# EAGLE board zeta2rework_lw_v34_rework (EAGLE 9.3.1)
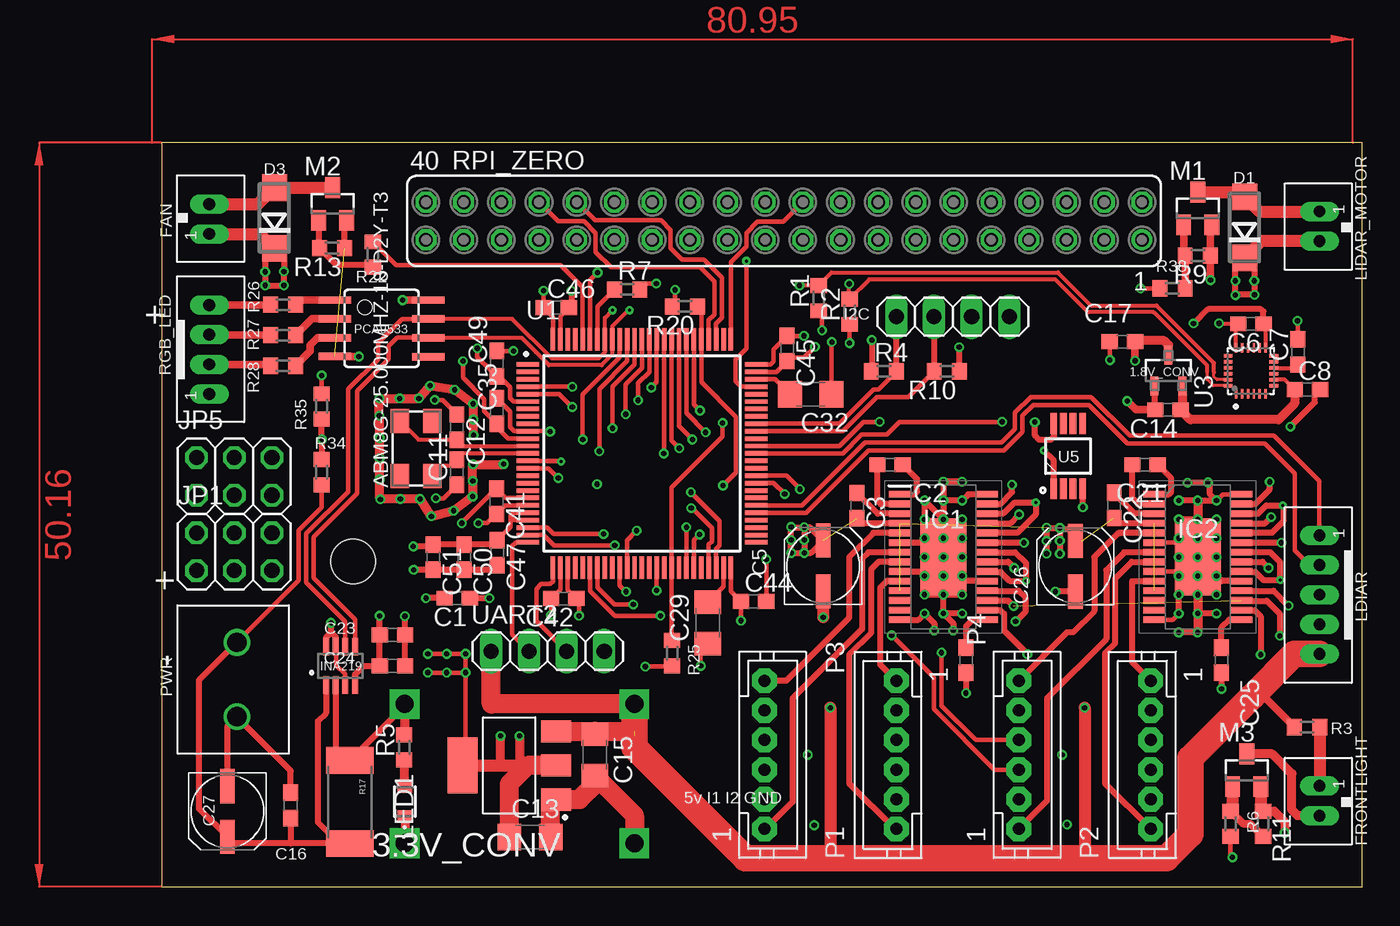
[diagram p0: board, top side]
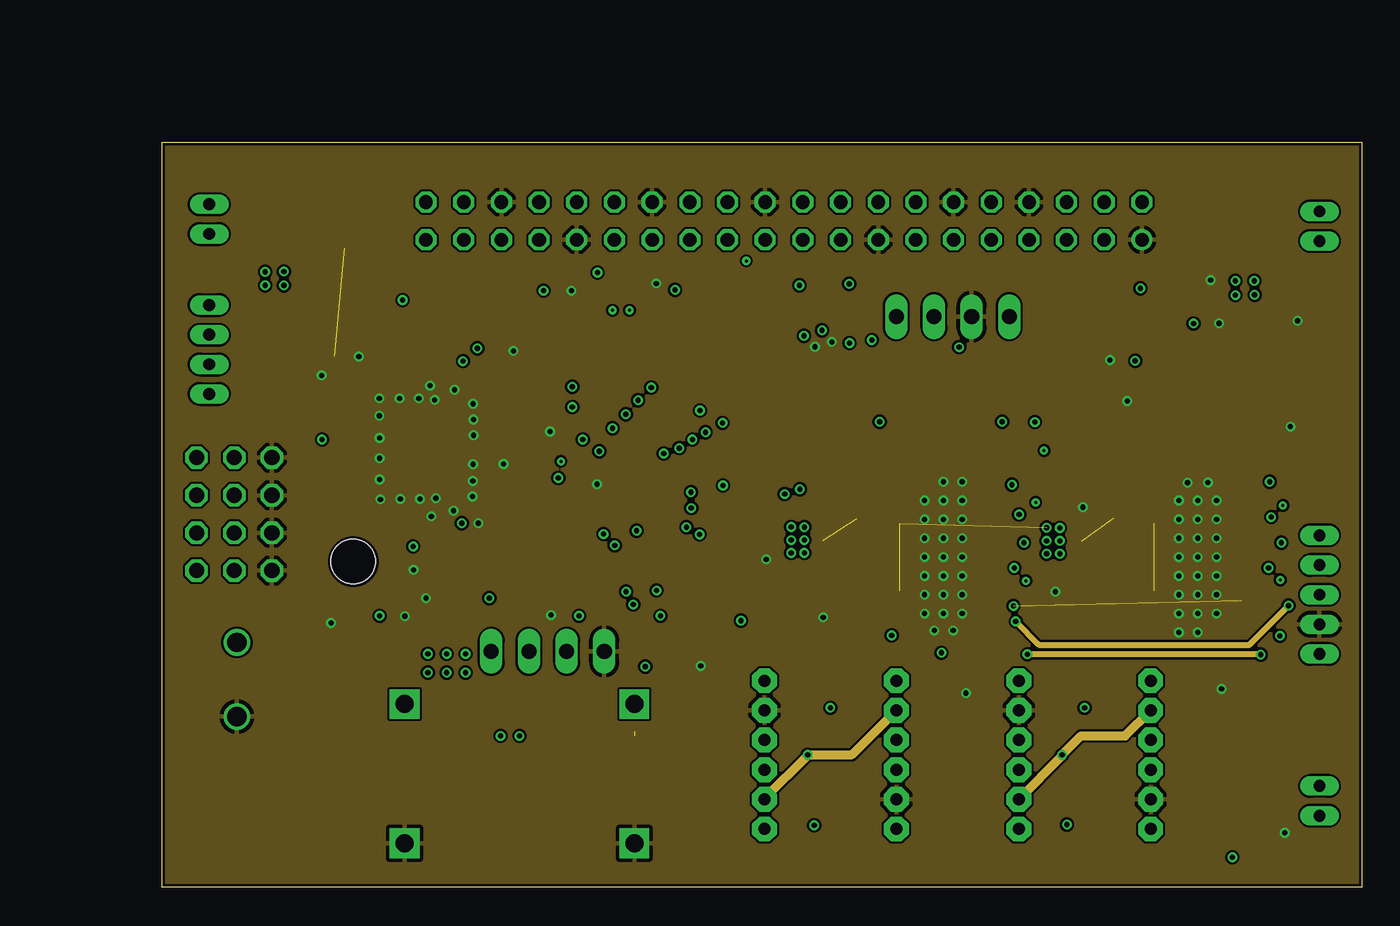
[diagram p1: board, inner layer Route2]
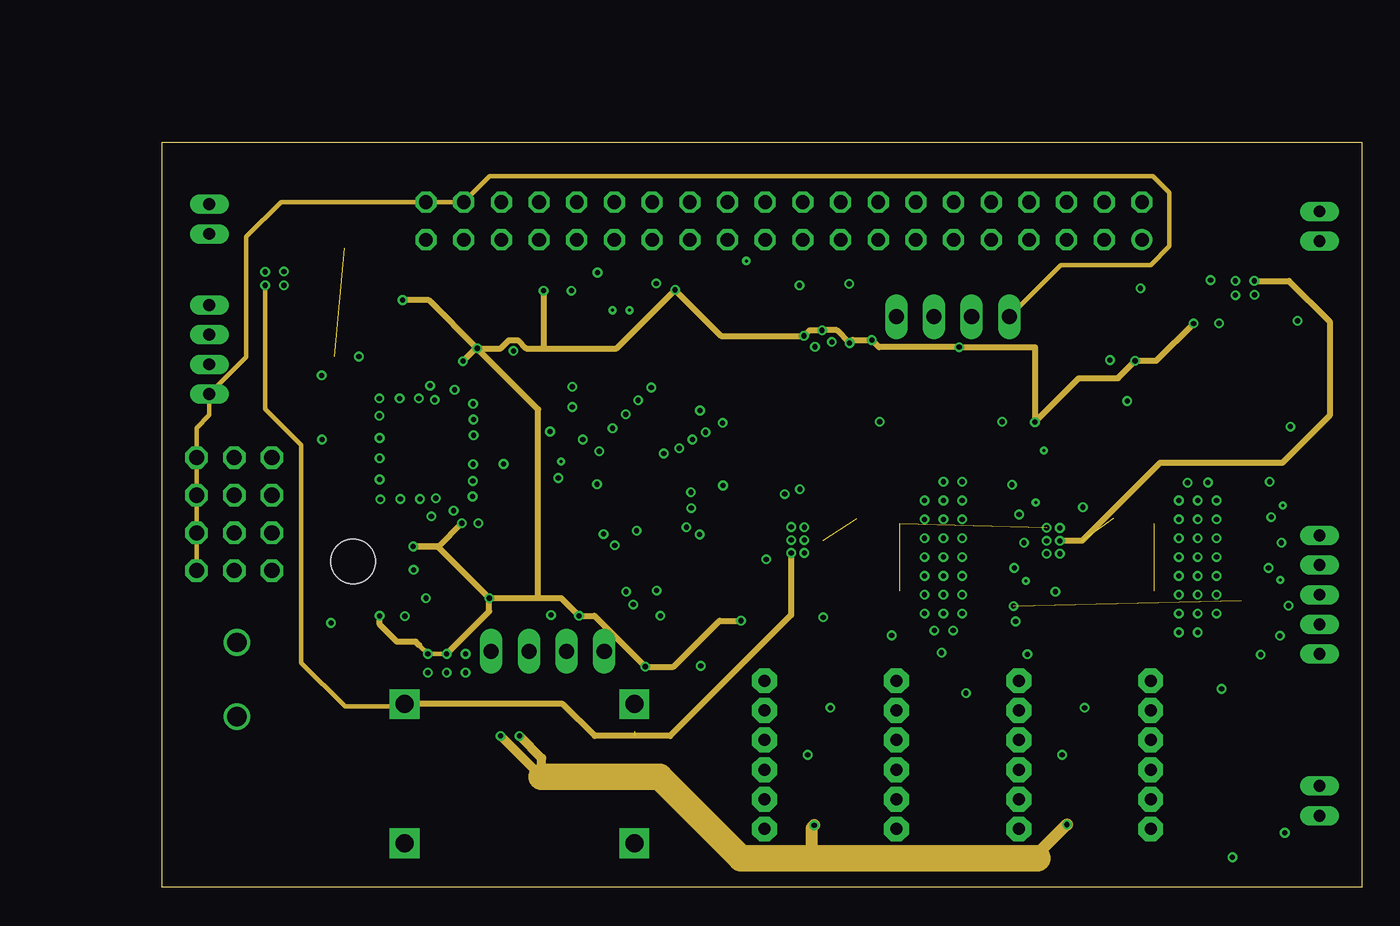
[diagram p2: board, inner layer Route15]
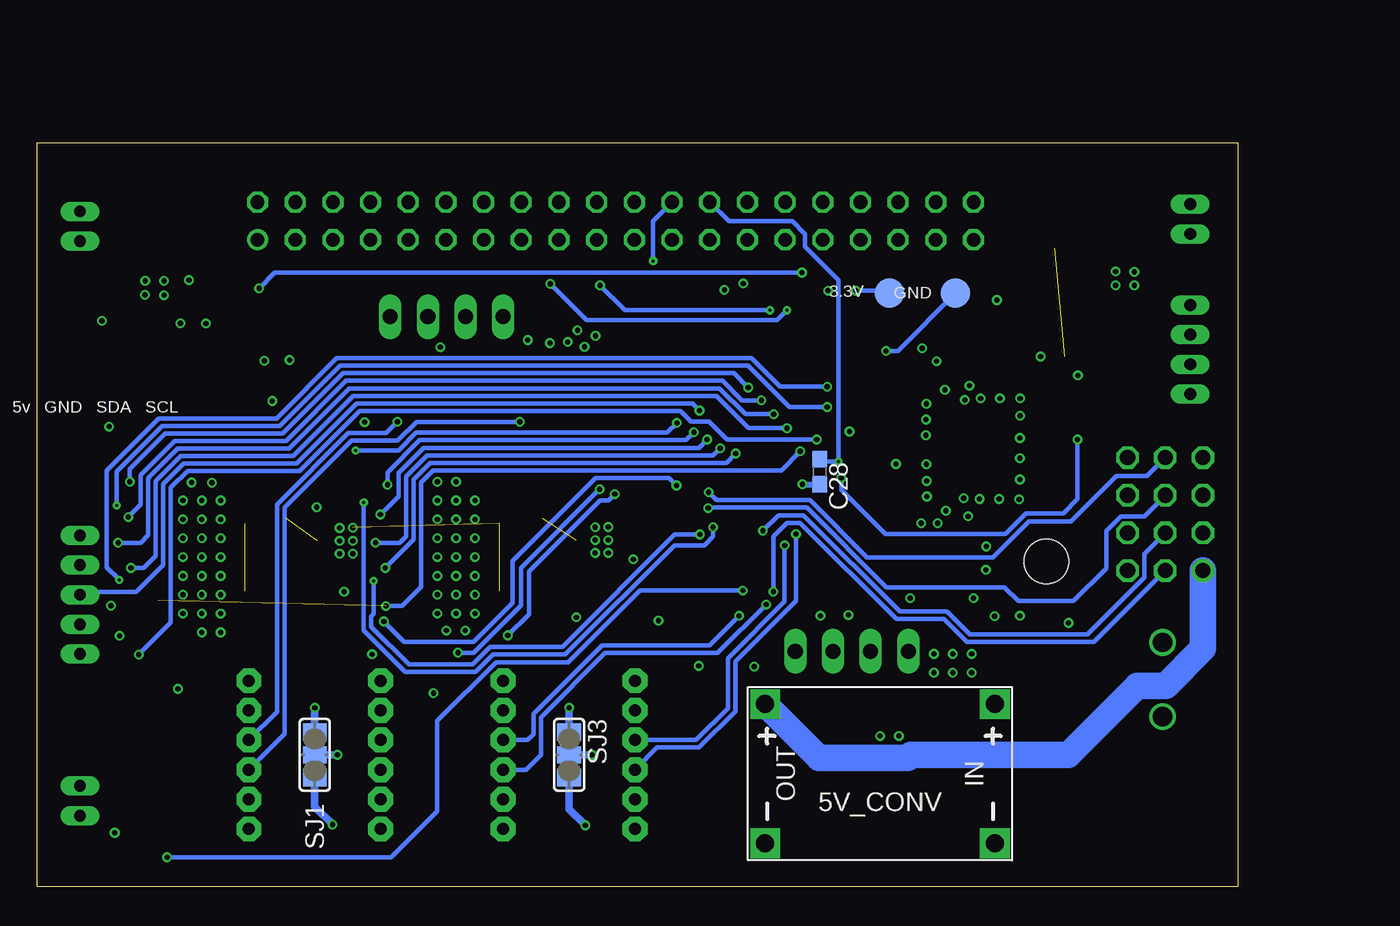
[diagram p3: board, bottom side, seen from below]

Size 80.95 x 50.16 mm. Coordinates in mm from the lower left corner, seen from the top.
Outline: 0,0 80.95,0 80.95,50.16 0,50.16 0,0
Copper layers (1*2*15*16): Top 0.035mm / dielectric 0.2mm / Route2 0.018mm / dielectric 1.5mm / Route15 0.018mm / dielectric 0.2mm / Bottom 0.035mm
Design rules "aisler_4_layer": minimum track width 0.1mm, minimum drill 0.2mm, track to track 0.1mm, track to pad 0.1mm, pad to pad 0.1mm, via to via 0.1mm, smd to smd 0.1mm, copper to edge 0.2mm, drill to drill 0.21mm, minimum pad ring 0.25mm, minimum via ring 0.15mm, stop-mask expansion 0mil, vias tented up to drill 0mil, thermal gap 10mil
Net classes: 0 default: clearance 0.152 mm
Holes 3 mm at 12.93,21.92

## Footprints (pad centres in the part's own frame; a part is rotated, then mirrored left to right if it is on the bottom)
SOT95P237X112-3N = smd 0.559 x 1.27: 1 -0.94,-1.041; 2 0.94,-1.041; 3 0,1.041
TP20R = smd 2 x 2: TP 0,0
SOT230P700X175-4N = smd 2 x 1.5: 1 -3.15,2.3; 2 -3.15,0; 3 -3.15,-2.3 | smd 2 x 3.8: 4 3.15,0
DC-DC-STEP-DOWN-MP2307 = drill 1.2 pad 2 square: IN+ -7.747,-4.699; IN- -7.747,4.699; OUT+ 7.747,-4.699; OUT- 7.747,4.699
5.0X3.2_KX-9A = smd 1.6 x 1.25: 1 -1.85,-1.1; 2 1.85,-1.1; 3 1.85,1.1; 4 -1.85,1.1
C0603 = smd 1.1 x 1: 1 -0.85,0; 2 0.85,0
UD-5X5,8_NICHICON = smd 2.3 x 1: + 1.725,0; - -1.7,0
C1206 = smd 1.6 x 1.8: 1 -1.4,0; 2 1.4,0
DO214AC = smd 1.8 x 1.7: A 2.05,0; C -2.05,0
JST_B2B-PH_HEADER = drill 0.8 long: P1 1.075,0.048; P2 -0.925,0.048
1X04 = drill 1.016 long: 1 -3.81,0; 2 -1.27,0; 3 1.27,0; 4 3.81,0
SOP65P640X120-29N = smd 1.475 x 0.45: 1 -2.938,4.225; 2 -2.938,3.575; 3 -2.938,2.925; 4 -2.938,2.275; 5 -2.938,1.625; 6 -2.938,0.975; 7 -2.938,0.325; 8 -2.938,-0.325; 9 -2.938,-0.975; 10 -2.938,-1.625; 11 -2.938,-2.275; 12 -2.938,-2.925; 13 -2.938,-3.575; 14 -2.938,-4.225; 15 2.938,-4.225; 16 2.938,-3.575; 17 2.938,-2.925; 18 2.938,-2.275; 19 2.938,-1.625; 20 2.938,-0.975; 21 2.938,-0.325; 22 2.938,0.325; 23 2.938,0.975; 24 2.938,1.625; 25 2.938,2.275; 26 2.938,2.925; 27 2.938,3.575; 28 2.938,4.225 | smd 3.1 x 5.18: 29 0,0
SOT23-8 = smd 0.4 x 1.2: 1 -0.975,-1.3; 2 -0.325,-1.3; 3 0.325,-1.3; 4 0.975,-1.3; 5 0.975,1.3; 6 0.325,1.3; 7 -0.325,1.3; 8 -0.975,1.3
2X03 = drill 1.016 octagon: 1 -2.54,-1.27; 2 -2.54,1.27; 3 0,-1.27; 4 0,1.27; 5 2.54,-1.27; 6 2.54,1.27
JST_B5B-PH_HEADER = drill 0.8 long: P1 4,0.048; P2 2,0.048; P3 0,0.048; P4 -2,0.048; P5 -4,0.048
LTM673-N1R2-25 = smd 0.8 x 1: 1 -1,0; 2 1,0
SOT23 = smd 1 x 1.4: 1 -0.95,-1.1; 2 0.95,-1.1; 3 0,1.1
JST-PH6 = drill 0.813 pad 1.676 octagon: 1 5,0; 2 3,0; 3 1,0; 4 -1,0; 5 -3,0; 6 -5,0
SOIC8 = smd 0.5 x 2.2: 1 -1.905,-3.154; 2 -0.645,-3.154; 3 0.625,-3.154; 4 1.895,-3.154; 5 1.905,3.154; 6 0.635,3.154; 7 -0.635,3.154; 8 -1.905,3.154
691137710002 = drill 1.3: 1 -2.5,0; 2 2.5,0
R0603 = smd 1 x 1.1: 1 -0.85,0; 2 0.85,0
2512 = smd 1.8 x 3.2: 1 -2.8,0; 2 2.8,0
JST_B4B-PH_HEADER = drill 0.8 long: P1 2.98,0.048; P2 0.98,0.048; P3 -1.02,0.048; P4 -3.02,0.048
FE20-2 = drill 0.914: 1 -24.13,1.27 | drill 0.914 octagon: 2 -24.13,-1.27; 3 -21.59,1.27; 4 -21.59,-1.27; 5 -19.05,1.27; 6 -19.05,-1.27; 7 -16.51,1.27; 8 -16.51,-1.27; 9 -13.97,1.27; 10 -13.97,-1.27; 11 -11.43,1.27; 12 -11.43,-1.27; 13 -8.89,1.27; 14 -8.89,-1.27; 15 -6.35,1.27; 16 -6.35,-1.27; 17 -3.81,1.27; 18 -3.81,-1.27; 19 -1.27,1.27; 20 -1.27,-1.27; 21 1.27,1.27; 22 1.27,-1.27; 23 3.81,1.27; 24 3.81,-1.27; 25 6.35,1.27; 26 6.35,-1.27; 27 8.89,1.27; 28 8.89,-1.27; 29 11.43,1.27; 30 11.43,-1.27; 31 13.97,1.27; 32 13.97,-1.27; 33 16.51,1.27; 34 16.51,-1.27; 35 19.05,1.27; 36 19.05,-1.27; 37 21.59,1.27; 38 21.59,-1.27; 39 24.13,1.27; 40 24.13,-1.27
SJ_2 = smd 1.168 x 1.6: 1 -1.524,0; 2 0,0; 3 1.524,0
QFP50P1600X1600X160-100N = smd 1.5 x 0.3: 1 -7.7,6; 2 -7.7,5.5; 3 -7.7,5; 4 -7.7,4.5; 5 -7.7,4; 6 -7.7,3.5; 7 -7.7,3; 8 -7.7,2.5; 9 -7.7,2; 10 -7.7,1.5; 11 -7.7,1; 12 -7.7,0.5; 13 -7.7,0; 14 -7.7,-0.5; 15 -7.7,-1; 16 -7.7,-1.5; 17 -7.7,-2; 18 -7.7,-2.5; 19 -7.7,-3; 20 -7.7,-3.5; 21 -7.7,-4; 22 -7.7,-4.5; 23 -7.7,-5; 24 -7.7,-5.5; 25 -7.7,-6; 51 7.7,-6; 52 7.7,-5.5; 53 7.7,-5; 54 7.7,-4.5; 55 7.7,-4; 56 7.7,-3.5; 57 7.7,-3; 58 7.7,-2.5; 59 7.7,-2; 60 7.7,-1.5; 61 7.7,-1; 62 7.7,-0.5; 63 7.7,0; 64 7.7,0.5; 65 7.7,1; 66 7.7,1.5; 67 7.7,2; 68 7.7,2.5; 69 7.7,3; 70 7.7,3.5; 71 7.7,4; 72 7.7,4.5; 73 7.7,5; 74 7.7,5.5; 75 7.7,6 | smd 0.3 x 1.5: 26 -6,-7.7; 27 -5.5,-7.7; 28 -5,-7.7; 29 -4.5,-7.7; 30 -4,-7.7; 31 -3.5,-7.7; 32 -3,-7.7; 33 -2.5,-7.7; 34 -2,-7.7; 35 -1.5,-7.7; 36 -1,-7.7; 37 -0.5,-7.7; 38 0,-7.7; 39 0.5,-7.7; 40 1,-7.7; 41 1.5,-7.7; 42 2,-7.7; 43 2.5,-7.7; 44 3,-7.7; 45 3.5,-7.7; 46 4,-7.7; 47 4.5,-7.7; 48 5,-7.7; 49 5.5,-7.7; 50 6,-7.7; 76 6,7.7; 77 5.5,7.7; 78 5,7.7; 79 4.5,7.7; 80 4,7.7; 81 3.5,7.7; 82 3,7.7; 83 2.5,7.7; 84 2,7.7; 85 1.5,7.7; 86 1,7.7; 87 0.5,7.7; 88 0,7.7; 89 -0.5,7.7; 90 -1,7.7; 91 -1.5,7.7; 92 -2,7.7; 93 -2.5,7.7; 94 -3,7.7; 95 -3.5,7.7; 96 -4,7.7; 97 -4.5,7.7; 98 -5,7.7; 99 -5.5,7.7; 100 -6,7.7
QFN40P300X300X105-25N = smd 0.64 x 0.22: 1 -1.545,1; 2 -1.545,0.6; 3 -1.545,0.2; 4 -1.545,-0.2; 5 -1.545,-0.6; 6 -1.545,-1; 13 1.545,-1; 14 1.545,-0.6; 15 1.545,-0.2; 16 1.545,0.2; 17 1.545,0.6; 18 1.545,1 | smd 0.22 x 0.64: 7 -1,-1.545; 8 -0.6,-1.545; 9 -0.2,-1.545; 10 0.2,-1.545; 11 0.6,-1.545; 12 1,-1.545; 19 1,1.545; 20 0.6,1.545; 21 0.2,1.545; 22 -0.2,1.545; 23 -0.6,1.545; 24 -1,1.545
SOP65P490X95-8N = smd 1.4 x 0.45: 1 -2.2,0.975; 2 -2.2,0.325; 3 -2.2,-0.325; 4 -2.2,-0.975; 5 2.2,-0.975; 6 2.2,-0.325; 7 2.2,0.325; 8 2.2,0.975

## Placement (x,y rotation side)
1.8V_CONV  MCP1700T-1802E/TT  [SOT95P237X112-3N]  67.87,34.8 0 top
3.3V  TPSQTP20R  [TP20R]  23.5,40.01 0 bottom
3.3V_CONV  NCP1117LPST33T3G  [SOT230P700X175-4N]  23.44,8.18 180 top
5V_CONV  DC-DC-STEP-DOWN-MP2307  [DC-DC-STEP-DOWN-MP2307]  24.13,7.62 180 bottom
ABM8G-25.000MHZ-18-D2Y-T3  25mhz  [5.0X3.2_KX-9A]  17.17,29.54 90 top
C1  4.7µf  [C0603]  19.94,19.46 180 top
C2  0.01µf 100v  [C0603]  49.11,28.45 180 top
C3  0.1µF 16v  [C0603]  46.89,25.69 270 top
C4  0.47µF 6.3v  [C0603]  54.23,15.28 270 top
C5  47µF  [UD-5X5,8_NICHICON]  44.6,21.62 90 top
C6  0.1nF  [C0603]  73.43,37.95 180 top
C7  0.1nF  [C0603]  76.61,36.05 90 top
C8  0.1nF  [C0603]  77.24,33.51 0 top
C11  Xpf  [C0603]  19.91,27.94 90 top
C12  Xpf  [C0603]  19.91,30.99 270 top
C13  10µF  [C1206]  24.84,3.35 0 top
C14  1µF  [C0603]  67.84,32.16 180 top
C15  10µF  [C1206]  29.21,8.89 270 top
C16  0.1µF  [C0603]  8.71,5.49 90 top
C17  1µF  [C0603]  64.77,36.75 180 top
C21  0.01µf 100v  [C0603]  66.29,28.45 180 top
C22  0.1µF 16v  [C0603]  64.21,25.7 270 top
C23  100nf  [C0603]  15.57,16.97 0 top
C24  0.1µF  [C0603]  15.57,14.88 0 top
C25  0.47µF 6.3v  [C0603]  71.45,15.28 270 top
C26  47µF  [UD-5X5,8_NICHICON]  61.59,21.59 90 top
C27  100µF  [UD-5X5,8_NICHICON]  4.45,5.08 270 top
C28  100nF  [C0603]  28.19,27.98 270 bottom
C29  2.2µf Low ESR < 2ohm  [C1206]  36.83,17.78 90 top
C32  2.2µf Low ESR < 2ohm  [C1206]  43.76,33.2 180 top
C35  100nF  [C0603]  22.61,32.07 90 top
C41  100nF  [C0603]  22.58,25.98 270 top
C42  100nF  [C0603]  27.11,19.43 180 top
C44  100nF  [C0603]  39.92,19.23 0 top
C45  100nF  [C0603]  42.16,36.28 270 top
C46  100nF  [C0603]  26.61,39.04 0 top
C47  100nF  [C0603]  22.63,22.52 270 top
C49  100nF  [C0603]  22.61,35.27 90 top
C50  100nF  [C0603]  20.4,22.21 270 top
C51  1µf  [C0603]  18.31,22.21 270 top
D1  1N4004 SMD  [DO214AC]  73.03,44.45 90 top
D3  1N4004 SMD  [DO214AC]  7.62,45.09 90 top
FAN  JST-PH_2-PIN_HEADER  [JST_B2B-PH_HEADER]  3.17,45.09 270 top
FRONTLIGHT  JST-PH_2-PIN_HEADER  [JST_B2B-PH_HEADER]  78.11,5.71 90 top
GND  TPSQTP20R  [TP20R]  19.05,40.01 0 bottom
I2C  [1X04]  53.34,38.43 0 top
IC1  DRV8844PWPR  [SOP65P640X120-29N]  52.7,22.23 0 top
IC2  DRV8844PWPR  [SOP65P640X120-29N]  69.85,22.23 0 top
INA219  INA219  [SOT23-8]  12.06,14.88 0 top
JP1  [2X03]  4.9,22.58 0 top
JP5  [2X03]  4.9,27.66 0 top
LDIAR  JST-PH_5-PIN_HEADER  [JST_B5B-PH_HEADER]  78.11,19.69 90 top
LED1  LT M673  [LTM673-N1R2-25]  16.41,5.74 90 top
LIDAR_MOTOR  JST-PH_2-PIN_HEADER  [JST_B2B-PH_HEADER]  78.11,44.45 90 top
M1  IRLML2502  [SOT23]  69.85,45.72 0 top
M2  IRLML2502  [SOT23]  11.53,46.02 0 top
M3  IRLML2502  [SOT23]  73.15,7.85 0 top
P1  [JST-PH6]  49.53,8.89 90 top
P2  [JST-PH6]  66.67,8.89 90 top
P3  [JST-PH6]  40.64,8.89 270 top
P4  [JST-PH6]  57.78,8.89 270 top
PCA9533  PCA9533  [SOIC8]  14.83,37.64 270 top
PWR  691137710002  [691137710002]  5.08,13.97 270 top
R1  10k  [R0603]  44.3,39.67 90 top
R2  10k  [R0603]  46.38,38.76 90 top
R3  0R  [R0603]  77.22,10.77 0 top
R4  10k  [R0603]  48.69,34.75 0 top
R5  390R  [R0603]  16.36,9.4 90 top
R6  22R  [R0603]  72.06,4.24 90 top
R7  10k  [R0603]  31.39,40.26 0 top
R9  100k  [R0603]  69.85,42.55 180 top
R10  10k  [R0603]  52.93,34.75 180 top
R11  100k  [R0603]  74.24,4.24 270 top
R13  100k  [R0603]  11.51,43.05 180 top
R17  0.1/1% (PT2512FK-070R1L)  [2512]  12.7,5.71 270 top
R20  100k  [R0603]  35.28,39.12 180 top
R22  22R  [R0603]  14.25,42.62 270 top
R25  4k7  [R0603]  34.42,15.75 270 top
R26  220R  [R0603]  8.2,39.24 180 top
R27  220R  [R0603]  8.2,37.19 180 top
R28  220R  [R0603]  8.2,35.13 180 top
R34  100k  [R0603]  10.79,27.94 270 top
R35  69k  [R0603]  10.79,32.38 270 top
R38  22R  [R0603]  68.15,40.34 0 top
RGB_LED  JST-PH_4-PIN_HEADER  [JST_B4B-PH_HEADER]  3.17,36.2 270 top
RPI_ZERO  [FE20-2]  41.96,44.88 180 top
SJ1  [SJ_2]  62.23,8.89 270 bottom
SJ3  [SJ_2]  45.09,8.89 270 bottom
U1  STM32F427VI  [QFP50P1600X1600X160-100N]  32.38,29.21 0 top
U3  ICM-20948  [QFN40P300X300X105-25N]  73.43,34.78 90 top
U5  DS18B20U+  [SOP65P490X95-8N]  61.11,29.03 90 top
UART2  [1X04]  26.04,15.88 0 top

## Library data of the parts
1.8V_CONV = MCP1700T-2102E_TT; AVAILABILITY: Unavailable; DESCRIPTION: 250mA CMOS LDO, Isupply 1uA and 2% VoutAccuracy; MF: Microchip; MP: MCP1700T-2102E/TT; PACKAGE: SOT-23 Microchip; PRICE: None
3.3V GND = testpad
3.3V_CONV = NCP1117LPST33T3G; AVAILABILITY: Unavailable; DESCRIPTION: Linear Voltage Regulator, Positive, LDO, 1.0 A _Fixed and Adjustable_ Vout: 3.3 V; MF: ON Semiconductor; MP: NCP1117LPST33T3G; PACKAGE: SOT-223 ON Semiconductor; PRICE: None
5V_CONV = diy-modules
ABM8G-25.000MHZ-18-D2Y-T3 = crystal-geyer_V1_0
C1-C8 C11-C17 C21-C29 C32 C35 C41 C42 C44-C47 C49-C51 = rcl; SPICEPREFIX: C
D1 D3 = diode
FAN FRONTLIGHT LDIAR LIDAR_MOTOR RGB_LED = srg
I2C JP1 JP5 UART2 = pinhead
IC1 IC2 = DRV8844PWPR; DESCRIPTION: 5A Brushed DC motor or Quad 1.75A Solenoid/Relay Driver with +/-30V split supply support (PWM Ctrl); HEIGHT: 1.2mm; MANUFACTURER_NAME: Texas Instruments; MANUFACTURER_PART_NUMBER: DRV8844PWPR; MOUSER_PART_NUMBER: 595-DRV8844PWPR; MOUSER_PRICE-STOCK: https://www.mouser.com/Search/Refine.aspx?Keyword=595-DRV8844PWPR
INA219 = INA219; AVAILABILITY: Unavailable; DESCRIPTION: the ina219 is a high-side current shunt and power monitor with an i2c interface. the ina219 monitors both shunt drop ...; MF: Texas Instruments; MP: INA219; PACKAGE: None; PRICE: None
LED1 = LT_M673-N1R2-25; DESCRIPTION: Osram Opto LT M673-N1R2-25, Mini TOPLED Series Green LED, 529 nm,, Rectangle Lens SMD Package; HEIGHT: mm; MANUFACTURER_NAME: OSRAM Opto Semiconductors; MANUFACTURER_PART_NUMBER: LT M673-N1R2-25; MOUSER_PART_NUMBER: 720-LTM673N1R225Z; MOUSER_PRICE-STOCK: https://www.mouser.com/Search/Refine.aspx?Keyword=720-LTM673N1R225Z; RS_PART_NUMBER: 9133231; RS_PRICE-STOCK: http://uk.rs-online.com/web/p/products/9133231
M1-M3 = IRLML2502TRPBF; AVAILABILITY: Unavailable; DESCRIPTION: Single N-Channel 20 V 0.08 Ohm 12 nC 1.25 W Silicon SMT Mosfet - SOT-23; MF: Infineon; MP: IRLML2502TRPBF; PACKAGE: SOT-23-3 Infineon; PRICE: None
P1-P4 = jst-ph
PCA9533 = adam - ics
PWR = term block; AVAILABILITY: Unavailable; DESCRIPTION: Term Block 2pos Side Entry 5mm; MF: Wurth Electronics; MP: 691137710002; PACKAGE: None; PRICE: None
R1-R7 R9-R11 R13 R20 R22 R25-R28 R34 R35 R38 = rcl; SPICEPREFIX: R
R17 = microbuilder
RPI_ZERO = con-lsta; OC_FARNELL: unknown; OC_NEWARK: unknown
SJ1 SJ3 = jumper
U1 = STM32F427VGT7; AVAILABILITY: Unavailable; DESCRIPTION: Ic Mcu 32bit 1mb Flash 100lqfp; MF: STMicroelectronics; MP: STM32F427VGT7; PACKAGE: LQFP-100 STMicroelectronics; PRICE: None
U3 = ICM-20948; AVAILABILITY: Unavailable; DESCRIPTION: 9 Axis=3 Axis Gyro+3 Axis Accel+Compass. Pin For Pin With m; MF: TDK InvenSense; MP: ICM-20948; PACKAGE: QFN-24 InvenSense; PRICE: None
U5 = DS18B20U_; AVAILABILITY: Unavailable; DESCRIPTION: Date Code: 1043+; RoHS Compliant: Yes;; MF: Maxim; MP: DS18B20U+; PACKAGE: TSSOP-8 Chip Coolers; PRICE: None

## Nets
+1.8V: 1.8V_CONV.2 C8.1 C14.1 U3.8
+3V3: 1.8V_CONV.3 3.3V.TP 3.3V_CONV.2 3.3V_CONV.4 C1.1 C6.1 C13.1 C17.1 C23.1 C24.1 C35.1 C41.1 C42.1 C44.1 C45.1 C46.1 C47.1 C49.1 C50.1 C51.1 INA219.4 PCA9533.8 R1.1 R2.1 R4.1 R10.1 R20.2 R25.2 SJ1.3 SJ3.3 U1.6 U1.11 U1.19 U1.21 U1.22 U1.28 U1.50 U1.75 U1.100 U3.13 U5.8
+5V: 3.3V_CONV.3 5V_CONV.OUT+ C15.1 I2C.4 JP1.1 JP1.2 JP5.1 JP5.2 LDIAR.P5 R3.1 RGB_LED.P1 RPI_ZERO.38 RPI_ZERO.40 SJ1.1 SJ3.1 UART2.1
+8V: 5V_CONV.IN+ C3.2 C5.+ C22.2 C26.+ D1.C D3.C FAN.P1 IC1.4 IC1.11 IC2.4 IC2.11 INA219.2 LIDAR_MOTOR.P2 R5.2 R17.1
BAT_LVL: R34.1 R35.2 U1.15
DEC_LB_1: P1.3 U1.31
DEC_LB_2: P1.4 U1.32
DEC_LF_1: P3.3 U1.23
DEC_LF_2: P3.4 U1.24
DEC_RB_1: P2.3 U1.63
DEC_RB_2: P2.4 U1.64
DEC_RF_1: P4.3 U1.59
DEC_RF_2: P4.4 U1.60
GND: 1.8V_CONV.1 3.3V_CONV.1 5V_CONV.IN- 5V_CONV.OUT- C1.2 C4.2 C5.- C6.2 C7.2 C8.2 C11.1 C12.1 C13.2 C14.2 C15.2 C16.2 C17.2 C23.2 C24.2 C25.2 C26.- C27.- C28.2 C29.1 C32.1 C35.2 C41.2 C42.2 C44.2 C45.2 C46.2 C47.2 C49.2 C50.2 C51.2 GND.TP I2C.3 IC1.6 IC1.9 IC1.14 IC1.19 IC1.28 IC1.29 IC2.6 IC2.9 IC2.14 IC2.19 IC2.28 IC2.29 INA219.3 INA219.7 INA219.8 JP1.5 JP1.6 JP5.5 JP5.6 LDIAR.P4 LED1.1 M1.2 M2.2 M3.2 P1.5 P2.5 P3.5 P4.5 PCA9533.4 PWR.2 R7.2 R9.1 R11.1 R13.1 R35.1 RPI_ZERO.1 RPI_ZERO.8 RPI_ZERO.12 RPI_ZERO.15 RPI_ZERO.22 RPI_ZERO.28 RPI_ZERO.31 RPI_ZERO.36 U1.10 U1.20 U1.27 U1.74 U1.99 U3.18 U5.4 UART2.4
I2C1_SCL: INA219.5 PCA9533.6 R1.2 U1.92 U3.23
I2C1_SDA: INA219.6 PCA9533.7 R2.2 U1.93 U3.24
I2C3_SCL: I2C.1 R4.2 U1.67
I2C3_SDA: I2C.2 R10.2 U1.66
LIDAR_POS_INT: LDIAR.P3 U1.81
M_LB_IN1: IC1.23 U1.84
M_LB_IN2: IC1.21 U1.85
M_LF_IN1: IC1.27 U1.82
M_LF_IN2: IC1.25 U1.83
M_PWM_LB: IC1.20 IC1.22 U1.45
M_PWM_LF: IC1.24 IC1.26 U1.44
M_PWM_RB: IC2.20 IC2.22 U1.4
M_PWM_RF: IC2.24 IC2.26 U1.5
M_RB_IN1: IC2.23 U1.88
M_RB_IN2: IC2.21 U1.89
M_RESET: IC1.16 IC2.16 U1.91
M_RF_IN1: IC2.27 U1.86
M_RF_IN2: IC2.25 U1.87
M_SLEEP: IC1.17 IC2.17 U1.90
N$1: C21.2 IC2.2
N$2: C21.1 IC2.1
N$3: C22.1 IC2.3
N$4: IC2.10 P2.1
N$6: FRONTLIGHT.P1 R3.2
N$7: LED1.2 R5.1
N$8: C7.1 U3.10
N$9: FRONTLIGHT.P2 M3.3
N$10: M3.1 R6.2 R11.2
N$11: IC2.5 P4.6
N$12: IC2.7 P4.1
N$13: ABM8G-25.000MHZ-18-D2Y-T3.1 C11.2 U1.13
N$14: IC1.5 P3.6
N$16: R7.1 U1.94
N$18: C2.2 IC1.2
N$19: IC2.8 P2.6
N$20: C2.1 IC1.1
N$21: C3.1 IC1.3
N$22: PCA9533.1 R26.1
N$23: PCA9533.2 R27.1
N$24: PCA9533.3 R28.1
N$26: C25.1 IC2.15
N$27: IC1.7 P3.1
N$28: IC1.8 P1.6
N$29: C4.1 IC1.15
N$30: IC1.10 P1.1
N$31: R26.2 RGB_LED.P4
N$32: P2.2 P4.2 SJ1.2
N$33: R27.2 RGB_LED.P3
N$35: R28.2 RGB_LED.P2
N$36: C29.2 U1.49
N$37: M2.1 R13.2 R22.2
N$38: M1.1 R9.2 R38.2
N$39: D1.A LIDAR_MOTOR.P1 M1.3
N$41: P1.2 P3.2 SJ3.2
N$44: ABM8G-25.000MHZ-18-D2Y-T3.3 C12.2 U1.12
N$45: C32.2 U1.73
N$55: D3.A FAN.P2 M2.3
NFAULT: IC1.18 IC2.18 R20.1 U1.80
NRST: C28.1 RPI_ZERO.26 U1.14
PWM1: JP5.3 U1.47
PWM2: JP5.4 U1.48
PWM3: JP1.3 U1.35
PWM4: JP1.4 U1.36
PWM_FAN: R22.1 U1.96
PWM_LIDAR: R38.1 U1.95
PWM_LIGHT: R6.1 U1.40
SWCLK: RPI_ZERO.20 U1.76
SWDIO: RPI_ZERO.24 U1.72
TEMPERATURE: R25.1 U1.42 U5.1
UART2_RX: U1.26 UART2.3
UART2_TX: U1.25 UART2.2
UART3_RX: LDIAR.P1 U1.56
UART3_TX: LDIAR.P2 U1.55
UART4_RX: RPI_ZERO.34 U1.79
UART4_TX: RPI_ZERO.32 U1.78
USB_OTG_DM: U1.70
USB_OTG_DP: U1.71
USB_OTG_ID: U1.69
USB_OTG_VBUS: U1.68
V+: C16.1 C27.+ INA219.1 PWR.1 R17.2 R34.2

## Tracks (layer width: path | path; a pad name or v marks a point on that pad's centre or on a via)
+1.8V
  Top 0.254: C8.1 75.72,34.18 U3.8
  Top 0.406: 68.81,32.27 C14.1
  Top 0.61: 1.8V_CONV.2 68.81,32.27 | C14.1 69.35,31.5 75.31,31.5 76.39,32.58 C8.1
+3V3  (via drill 0.35)
  Top 0.254: U3.13 74.43,37.8 C6.1
  Top 0.305: U1.28 27.39,20.01 C42.1 28.14,19.25 v28.14,18.26 | v43.31,37.13 C45.1 41.25,36.22 41.25,35.41 41.05,35.21 U1.75 | U1.100 26.39,38.41 C46.1 v25.76,40.18 | U1.11 23.36,30.21 22.61,30.96 C35.1 21.74,32.09 21.74,32.89 20.32,34.31 v20.32,35.43 | U1.19 23.2,26.21 C41.1 22.57,26.83 v20.24,24.51 | U1.21 23.69,25.21 23.52,25.04 23.52,24.87 | U1.22 23.68,24.71 23.52,24.87 | v34.62,40.23 34.62,39.31 R20.2 | 23.52,24.87 23.52,24.25 C47.1 | U1.6 23.73,32.71 23.5,32.94 23.5,33.68 22.76,34.42 C49.1 22.25,34.06 22.25,34.75 21.29,35.71 v21.29,36.3 | U1.50 38.38,19.91 C44.1 v39.07,17.93 v39.06,17.93 | R25.2 34.38,14.86 32.64,14.86 v32.61,14.83 | R1.1 44.53,38.6 v44.53,37.52 | R2.1 v46.38,36.65 | v17.96,15.7 v19.23,15.7 v20.5,15.7 v20.5,14.43 | v20.5,14.43 v19.23,14.43 v17.96,14.43 | v20.5,14.43 20.5,8.38 3.3V_CONV.4
  Top 0.406: C47.1 22.33,23.06 C50.1 C51.1 18.19,22.93 v16.97,22.93 v16.97,22.94 | INA219.4 13.04,14.31 13.61,14.88 C24.1 C23.1 14.72,18.25 v14.71,18.26 | R10.1 53.78,36.36 v53.77,36.37 | v47.88,36.86 47.88,34.78 R4.1 | C1.1 v22.1,19.46 | C6.1 74.28,38.77 74.12,38.94 70.54,38.94 v69.57,37.97 | U5.8 60.14,30.34 59.92,30.12 59.16,30.12 58.88,30.4 v58.88,31.32
  Top 0.508: PCA9533.8 v16.26,39.55 | C17.1 65.62,35.47 v65.63,35.46
  Top 0.61: 1.8V_CONV.3 67.87,36.52 67.59,36.8 65.67,36.8 C17.1 | 22.86,8.18 v22.86,10.16 | v24.13,10.16 24.13,8.18
  Top 0.813: 3.3V_CONV.4 22.86,8.18 24.13,8.18 24.69,8.18
  Top 1.27: 3.3V_CONV.2 24.69,8.18 23.44,6.93 C13.1
  Route15 0.305: v19.23,15.7 v17.96,15.7 17.38,16.28
  Route15 0.406: 17.38,16.28 17.14,16.51 15.88,16.51 14.71,17.68 v14.71,18.26 | v19.23,15.7 22.1,18.57 v22.1,19.46 | v22.1,19.46 25.4,19.46 | 25.4,19.46 26.95,19.46 v28.14,18.26 29.18,18.26 v32.61,14.83 34.52,14.83 37.62,17.93 v39.06,17.93 | v22.1,19.46 18.62,22.94 v16.97,22.94 18.67,22.94 v20.24,24.51 | 25.4,19.46 25.4,32.18 v21.29,36.3 | v21.29,36.3 22.86,36.3 23.42,36.85 24.03,36.85 24.58,36.3 25.76,36.3 | 25.76,36.3 30.68,36.3 v34.62,40.23 37.72,37.13 v43.31,37.13 43.69,37.52 v44.53,37.52 45.52,37.52 v46.38,36.65 46.58,36.86 v47.88,36.86 48.36,36.37 v53.77,36.37 58.88,36.37 v58.88,31.32 61.85,34.29 64.47,34.29 v65.63,35.46 67.06,35.46 v69.57,37.97 | v21.29,36.3 18.03,39.55 v16.26,39.55 | v20.32,35.43 21.18,36.3 v21.29,36.3 | v25.76,40.18 25.76,36.3
  Route15 0.61: v22.86,10.16 25.63,7.39 25.63,8.66 v24.13,10.16
  Route15 0.813: v43.99,4.14 43.81,3.96 43.81,1.91 | v61.04,4.19 59.05,2.21 59.05,1.91
  Route15 1.778: 59.05,1.91 43.81,1.91 39.06,1.91 33.58,7.39 25.63,7.39
  Bottom 0.305: 3.3V.TP 23.67,40.18 v25.76,40.18
  Bottom 0.508: SJ3.3 45.09,5.23 v43.99,4.14 | SJ1.3 62.23,5.38 v61.04,4.19
+5V  (via drill 0.35)  (1 unrouted)
  Top 0.508: C15.1 29.21,10.48 | R3.1 74.3,12.84 73.52,12.84
  Top 0.61: 31.46,11.9 5V_CONV.OUT+ 32.22,12.66
  Top 0.813: v45.09,12.07 45.09,1.91 | v62.23,12.07 62.23,1.91
  Top 1.27: 3.3V_CONV.3 29.21,10.48 31.88,10.48 | 5V_CONV.OUT+ 22.23,12.32 UART2.1
  Top 1.778: 5V_CONV.OUT+ 31.88,10.48 | 31.88,10.16 31.88,9.4 39.37,1.91 45.09,1.91 62.23,1.91 67.72,1.91 69.34,3.52 69.34,8.66 73.52,12.84 76.37,15.69 LDIAR.P5
  Route15 0.305: JP1.1 JP1.2 JP5.1 JP5.2 2.36,30.94 3.22,31.8 RGB_LED.P1 5.71,35.71 5.71,43.81 8.05,46.15 RPI_ZERO.40 RPI_ZERO.38 22.12,47.9 66.83,47.9 67.94,46.79 67.94,43.18 66.67,41.91 60.63,41.91 I2C.4
  Bottom 0.508: SJ3.1 v45.09,12.07 | SJ1.1 v62.23,12.07
  Bottom 1.778: JP1.1 2.36,16.05 4.88,13.54 6.78,13.54 11.43,8.89 22.05,8.89 22.25,8.69 28.25,8.69 5V_CONV.OUT+
+8V  (via drill 0.35)  (5 unrouted)
  Top 0.406: IC1.4 47.23,24.5 C3.2 | INA219.2 11.74,9.06 12.29,8.52 R17.1 16.38,12.2 5V_CONV.IN+ | IC2.4 64.57,24.5 C22.2 | v43.33,24.23 43.71,24.23 C5.+ 43.77,22.5 v43.33,22.5 | v43.33,22.5 v43.33,23.37 v43.33,24.23 | v60.55,22.45 v60.55,23.32 v60.55,24.18 | v59.66,22.45 v59.66,23.32 v59.66,24.21 59.69,24.18 v60.55,24.18 | v60.55,24.18 60.6,24.13 61.59,24.13 C26.+ | v43.33,24.23 42.47,24.23 v42.44,24.26 v42.44,23.37 v42.44,22.5 v43.33,22.5 | D3.C 6.99,42.4 v6.99,41.45 v6.99,40.54 v8.26,40.54 v8.26,41.48 8.26,42.4 D3.C | D1.C 73.66,41.77 v73.66,40.84 73.69,40.82 v73.69,39.9 72.42,39.9 v72.39,39.88 v72.39,40.84 72.39,42.55 72.88,42.55 D1.C
  Top 0.61: 16.38,12.2 16.38,10.27 R5.2
  Top 0.813: FAN.P1 6.64,44.01 D3.C | LIDAR_MOTOR.P2 74.15,43.52 D1.C
  Route15 0.305: v6.99,40.54 6.99,32.21 9.42,29.77 9.42,15.09 12.37,12.14 15.8,12.14 15.88,12.07 16.13,12.07 5V_CONV.IN+
  Route15 0.406: v42.44,22.5 42.44,18.31 34.29,10.16 29.21,10.16 27.05,12.32 5V_CONV.IN+ | v73.66,40.84 76,40.84 78.74,38.1 78.74,31.75 75.56,28.58 67.31,28.58 62.05,23.32 v60.55,23.32
  Bottom 0.406: 73.66,39.93 v73.69,39.9
BAT_LVL  (via drill 0.35)
  Top 0.305: U1.15 26.09,28.21 v26.75,27.56
  Top 0.406: R35.2 10.79,30.17 v10.82,30.15 10.79,30.12 R34.1
  Bottom 0.305: v10.82,30.15 10.82,26.14 11.78,25.17 14.29,25.17 15.69,23.77 23.77,23.77 26.75,26.75 v26.75,27.56
DEC_LB_1  (via drill 0.35)
  Top 0.305: U1.31 28.89,19.93 30.56,18.26 v33.63,18.26
  Bottom 0.305: v33.63,18.26 35.64,16.26 42.88,16.26 47.5,11.64 47.5,10.29 47.9,9.89 P1.3
DEC_LB_2  (via drill 0.35)
  Top 0.305: U1.32 29.39,20.17 30.53,19.03 v31.8,19.03
  Bottom 0.305: v31.8,19.03 35.08,15.75 42.67,15.75 46.99,11.43 46.99,8.89 47.99,7.89 P1.4
DEC_LF_1  (via drill 0.35)
  Top 0.305: U1.23 26.01,24.21 26.44,23.77 v29.79,23.77
  Bottom 0.305: v29.79,23.77 29.79,19.27 33.88,15.18 33.88,11.83 36.33,9.38 39.15,9.38 P3.3
DEC_LF_2  (via drill 0.35)
  Top 0.305: U1.24 25.77,23.71 26.47,23.01 v30.56,23.01
  Bottom 0.305: v30.56,23.01 30.56,19.23 34.39,15.39 34.39,12.04 36.54,9.89 P3.4
DEC_RB_1  (via drill 0.35)
  Top 0.305: U1.63 45.92,29.21 47.19,30.48 48.9,30.48 49.76,31.34 v56.67,31.34
  Bottom 0.305: P2.3 64.77,11.8 64.77,25.78 59.97,30.58 57.42,30.58 56.67,31.33 v56.67,31.34
DEC_RB_2  (via drill 0.35)
  Top 0.305: U1.64 45.69,29.71 47.32,31.34 v48.41,31.34
  Bottom 0.305: P2.4 64.26,10.3 64.26,25.57 59.76,30.07 56.65,30.07 55.38,31.34 v48.41,31.34
DEC_RF_1  (via drill 0.35)
  Top 0.305: U1.59 41.27,27.21 v42.01,26.47 | v49.23,16.94 52.07,14.1 52.07,11.98 56.16,7.89 P4.3
  Bottom 0.305: v42.01,26.47 42.44,26.04 43.02,26.04 47.8,21.25 47.8,18.36 v49.23,16.94
DEC_RF_2  (via drill 0.35)
  Top 0.305: P4.4 54.88,9.89 52.58,12.19 v52.58,15.77 | U1.60 42.12,27.71 v43.03,26.8
  Bottom 0.305: v43.03,26.8 48.34,21.49 48.34,18.97 51.54,15.77 v52.58,15.77
GND  (via drill 0.35)  (1 unrouted)
  Top 0.254: U3.18 72.43,37.8 C6.2 72.56,37.98 v71.29,37.98
  Top 0.305: U1.27 26.89,20.05 C42.2 v26.26,18.31 | U1.74 41.44,34.71 C45.2 42.39,35.66 43.31,35.66 v44.04,36.4 | U1.99 26.89,38.47 C46.2 | 22.6,25.15 C41.2 | v33.35,40.66 32.65,40.66 R7.2 | U1.20 23.16,25.71 C41.2 | C49.2 v23.72,36.12 | v40.77,22.07 C44.2 | C32.1 45.16,36.27 v45.19,36.73 | v76.58,38.16 76.58,36.92 C7.2 | IC2.28 71.53,26.45 v71.12,26.04 | IC2.6 68.28,23.2 v68.58,23.5 | IC2.9 68.28,21.25 v68.58,20.96 | IC2.14 68.17,18 v68.58,18.41 | 22.48,32.92 C35.2 23.49,32.04 23.49,31 23.78,30.71 U1.10 26.16,30.71 v26.19,30.68 | C41.2 21.96,24.51 v21.36,24.51 | C12.1 18.93,32.82 v18.41,32.82 | C11.1 19.01,26.19 v18.49,26.19 | C29.1 36.35,15.9 v36.35,14.88 | R35.1 v10.79,34.47 | C17.2 63.93,36.74 v63.93,35.51 | INA219.3 12.39,14.33 11.79,14.94 11.79,16.14 INA219.7
  Top 0.406: IC1.19 53.06,20.6 v52.7,20.96 | v52.7,26.04 v53.98,26.04 54.39,26.45 IC1.28 | v53.98,27.3 v52.7,27.3 v52.7,26.04 | v53.98,18.41 v52.7,18.41 | v53.98,19.69 v52.7,19.69 | v52.7,19.69 v51.44,19.69 | IC1.29 v51.44,22.23 | v52.7,26.04 v52.7,24.77 | v52.7,18.41 v52.7,19.69 | v52.7,18.41 53.37,17.75 v53.37,17.27 | IC1.6 51.14,23.2 v51.44,23.5 | IC1.9 51.14,21.25 v51.44,20.96 | IC1.14 51.02,18 v51.44,18.41 52.09,17.75 v52.09,17.27 | 1.8V_CONV.1 66.93,32.22 C14.2 | v69.85,24.77 v68.58,24.77 | v71.12,18.41 v69.85,18.41 | v69.85,17.14 v68.58,17.14 | C47.2 22.33,21.36 C50.2 C51.2 v16.99,21.36 | M2.2 12.28,44.72 12.36,44.65 R13.1 | INA219.7 11.74,16.84 11.43,17.14 | 11.43,17.14 11.09,16.8 INA219.8 | 11.43,17.14 v11.43,17.78 | C24.2 C23.2 v16.42,18.23 v16.41,18.24 | C4.2 v54.23,13.06 | C25.2 v71.45,13.34 | v69.16,27.23 70.31,27.23 70.33,27.25 v70.54,27.25 70.64,27.15 70.64,26.52 v71.12,26.04 v69.85,26.04 v68.58,26.04 | v68.58,18.41 v68.58,19.69 | IC2.29 v68.58,20.96 | IC2.29 v68.58,22.23 | IC2.29 v68.58,23.5 | IC2.29 v69.85,19.69 | v52.7,20.96 v52.7,19.69 | v52.7,23.5 v52.7,24.77 | v52.7,24.77 v51.44,26.04 v51.44,24.77 | v52.7,23.5 v53.98,24.77 | IC1.29 v52.7,23.5 | IC1.29 v52.7,20.96 | IC1.29 v52.7,19.69 | v27.64,40.18 27.64,39.22 C46.2 | IC2.19 71.47,20.6 v71.12,20.96 | U5.4 62.09,25.59 v62.1,25.58 | C1.2 v17.83,19.46 | C26.- v60.25,19.89 | C27.- 4.45,10.84 5.06,11.45 | 5.06,11.45 PWR.2 | C16.2 8.71,7.8 5.06,11.45 | v76.1,31.02 77.75,32.67 77.75,33.17 C8.2
  Top 0.508: M1.2 70.7,44.52 R9.1 70.7,40.91 v70.71,40.89 | PCA9533.4 13.3,35.75 v13.31,35.74 | C14.2 65.68,32.16 v65.1,32.74
  Top 0.61: v69.85,26.04 v69.85,24.77 | v69.85,19.69 v69.85,18.41 v69.85,17.14 | v19.68,25.35 19.66,25.38 | 20.97,27.34 v20.98,27.36 | v21.01,28.48 20.98,28.45 v20.98,27.36 | v21.01,28.48 21.03,28.5 | v21.01,28.48 23.04,28.48 v23.06,28.5 | v20.98,27.36 20.98,26.33 | 20.98,26.33 v20.97,26.31 | v21.03,30.43 v21.03,31.5 21.01,31.52 v21.01,32.56 v19.76,33.5 v18.11,33.78 v17.35,32.92 v16.05,32.92 v14.68,32.92 v14.68,31.75 14.71,31.73 v14.71,30.25 v14.71,28.88 v14.71,27.46 14.71,26.16 v14.76,26.11 14.78,26.14 v16.1,26.14 v17.42,26.14 v18.19,24.97 v19.68,25.35 | v19.68,25.35 20.98,26.33 | R11.1 74.99,5.09 75.72,4.37 v75.72,3.63 | LED1.1 16.41,2.95 5V_CONV.IN-
  Top 0.813: M3.2 74.1,5.23 R11.1 | C5.- v44.6,18.16
  Top 1.27: C13.2 26.24,5.53 3.3V_CONV.1 28.18,5.88 29.21,6.91 C15.2 31.88,4.82 5V_CONV.OUT-
  Bottom 0.305: v26.26,18.31 26.14,18.31 | GND.TP 22.94,36.12 v23.72,36.12
  Bottom 0.406: v29.36,27.13 C28.2
  other vias: 53.98,20.96 53.98,22.23 52.7,22.23 53.98,23.5 71.12,24.77 71.12,23.5 69.85,23.5 71.12,22.23 69.85,22.23 69.85,20.96 71.12,19.69
  cutout Top: 70.89,31.6 75.97,31.6 arc90 76.61,32.24 76.61,37.32 arc90 75.97,37.95 70.89,37.95 arc90 70.26,37.32 70.26,32.24 arc90
  cutout Bottom: 70.26,36.68 70.26,32.24 arc90 70.89,31.6 75.97,31.6 arc90 76.61,32.24 76.61,36.68 arc90 75.97,37.95 70.89,37.95 arc90
  pour Route2: -3.81,52.07 -3.81,-1.91 85.72,-1.91 85.72,52.07
I2C1_SCL  (via drill 0.2 pad 0.55, 0.35)
  Top 0.203: U3.23 71.16,34.18 70.94,34.39 70.94,34.7
  Top 0.254: v31.55,38.86 31.47,38.86 30.39,37.78 U1.92 30.39,35.86 29.68,35.15 26.11,35.15 25.23,36.03 24.26,37.01 PCA9533.6 | v43,40.54 44.28,40.54 R1.2 45.17,41.4 60.44,41.4 62.65,39.19 67.07,39.19 70.94,35.32 70.94,34.7
  Top 0.305: INA219.5 13.04,18.04 10.26,20.82 10.26,23.59 13.18,26.52 13.18,33.43 15.32,35.56 15.32,36.45 15.88,37.01 PCA9533.6
  Bottom 0.305: v43,40.54 41.33,38.86 v31.55,38.86
I2C1_SDA  (via drill 0.2 pad 0.55, 0.35)
  Top 0.203: U3.24 70.89,33.78 70.48,34.19 70.48,34.72
  Top 0.254: v30.4,38.86 29.89,38.34 U1.93 29.89,36.03 29.46,35.61 26.31,35.61 23.65,38.28 PCA9533.7 | v46.35,40.64 46.35,39.64 R2.2 47.72,40.95 60.25,40.95 62.46,38.73 66.88,38.73 70.48,35.13 70.48,34.72
  Top 0.305: INA219.6 12.39,17.89 9.75,20.53 9.75,23.81 12.57,26.63 12.57,33.54 14.59,35.55 14.59,36.64 16.23,38.28 PCA9533.7
  Bottom 0.305: v30.4,38.86 31.06,38.2 43.91,38.2 v46.35,40.64
I2C3_SCL
  Top 0.305: U1.67 45.69,31.21 48.01,33.53 48.32,33.53 R4.2
  Top 0.406: R4.2 49.53,34.76 I2C.1
I2C3_SDA
  Top 0.305: U1.66 45.92,30.71 48.23,33.02 50.36,33.02 R10.2
  Top 0.406: I2C.2 52.08,38.42 R10.2
LIDAR_POS_INT  (via drill 0.35)
  Top 0.305: U1.81 35.88,32.52 v36.3,32.11
  Bottom 0.305: v36.3,32.11 36.78,32.59 59.41,32.59 63.47,28.52 71.06,28.52 72.44,27.15 72.44,21.69 74.27,19.86 77.88,19.86 LDIAR.P3
M_LB_IN1  (via drill 0.35)
  Top 0.305: U1.84 34.38,30.08 v34.9,29.57
  Top 0.406: IC1.23 v58.13,23.2 v58.14,23.19
  Bottom 0.305: v34.9,29.57 35.38,29.08 54.67,29.08 56.08,27.67 56.08,23.61 56.5,23.19 v58.14,23.19
M_LB_IN2  (via drill 0.35)
  Top 0.305: v33.86,29.21 33.88,29.24 U1.85
  Top 0.406: IC1.21 57.08,21.9 v57.48,21.49
  Bottom 0.305: v33.86,29.21 34.49,28.58 54.46,28.58 55.58,27.46 55.58,23.4 v57.48,21.49
M_LF_IN1  (via drill 0.35)
  Top 0.305: U1.82 35.38,31.92 v36.68,30.63
  Top 0.406: IC1.27 55.66,25.82 56.55,25.82 57.33,26.6 v57.33,27.1
  Bottom 0.305: v36.68,30.63 37.21,30.1 55.17,30.1 57.33,27.94 v57.33,27.1
M_LF_IN2  (via drill 0.35)
  Top 0.305: U1.83 34.88,31.05 v35.79,30.15
  Top 0.406: IC1.25 57.21,24.5 v57.81,25.1
  Bottom 0.305: v35.79,30.15 36.35,29.59 54.88,29.59 56.59,27.88 56.59,26.31 v57.81,25.1
M_PWM_LB  (via drill 0.2 pad 0.55, 0.35)
  Top 0.305: U1.45 35.88,23.36 v36.27,23.75
  Top 0.406: IC1.22 57.53,22.55 58.27,21.82 58.27,21.17 v58.27,20.62 57.16,20.62 56.55,21.23 55.66,21.23 IC1.20
  Bottom 0.305: v36.27,23.75 37.97,23.75 45.54,16.18 50.41,16.18 51.6,14.99 55.88,14.99 58.42,17.53 58.42,18.24 58.27,18.39 v58.27,20.62
M_PWM_LF  (via drill 0.2 pad 0.55, 0.35)
  Top 0.305: U1.44 v35.38,24.23
  Top 0.406: IC1.24 57.69,23.85 58.93,25.09 v58.93,25.91 v58.93,25.9 57.49,25.9 56.76,25.17 55.66,25.17 IC1.26
  Bottom 0.305: v35.38,24.23 35.38,23.6 35.97,23.01 37.99,23.01 45.36,15.65 50.23,15.65 51.39,14.48 56.13,14.48 58.93,17.28 v58.93,25.91
M_PWM_RB  (via drill 0.2 pad 0.55, 0.35)
  Top 0.305: U1.4 v27.68,33.71 v27.69,33.71
  Top 0.406: IC2.20 72.81,21.23 73.73,21.23 74.28,20.68 v75.41,20.68 75.41,21.87 74.73,22.55 IC2.22
  Bottom 0.305: v27.69,33.71 30.88,33.71 32.81,35.63 60.74,35.63 64.81,31.57 72.75,31.57 76.25,28.07 76.25,21.54 75.41,20.7 v75.41,20.68
M_PWM_RF  (via drill 0.2 pad 0.55, 0.35)
  Top 0.305: U1.5 26.81,33.21 v27.69,32.33
  Top 0.406: IC2.26 73.93,25.15 74.48,25.7 v75.59,25.7 75.62,25.68 75.62,24.62 74.84,23.85 IC2.24
  Bottom 0.305: v27.69,32.33 30.25,32.33 33.04,35.12 60.53,35.12 64.6,31.06 72.52,31.06 75.59,28 v75.59,25.7
M_RB_IN1  (via drill 0.35)
  Top 0.305: U1.88 32.38,34.95 31.29,33.86 v31.29,31.85
  Top 0.406: IC2.23 75.48,23.2 v75.49,23.19
  Bottom 0.305: v75.49,23.19 73.97,23.19 73.46,23.7 73.46,27.56 71.48,29.54 63.96,29.54 59.9,33.6 34.95,33.6 33.2,31.85 v31.29,31.85
M_RB_IN2  (via drill 0.35)
  Top 0.305: U1.89 31.89,35.19 30.4,33.71 v30.4,30.91
  Top 0.406: IC2.21 74.21,21.9 v74.62,21.49
  Bottom 0.305: v74.62,21.49 73.76,21.49 72.95,22.3 72.95,27.35 71.27,29.03 63.7,29.03 59.64,33.09 35.16,33.09 32.98,30.91 v30.4,30.91
M_RESET  (via drill 0.35)
  Top 0.305: U1.91 30.89,35.66 28.4,33.17 v28.4,30.15
  Top 0.406: IC2.16 72.81,18.63 73.69,18.63 74.09,18.23 v74.09,15.65 | IC1.16 56.53,18.65 56.79,18.39 56.79,17.28 58.37,15.7 v58.37,15.67
  Route2 0.406: v74.09,15.65 74.07,15.67 v58.37,15.67
  Bottom 0.305: v28.4,30.15 34.45,30.15 35.66,31.37 36.88,31.37 37.59,32.08 59.2,32.08 63.26,28.02 70.81,28.02 71.93,26.9 71.93,17.81 v74.09,15.65
M_RF_IN1  (via drill 0.35)
  Top 0.305: U1.86 33.38,34.02 v33.02,33.66
  Top 0.406: IC2.27 73.71,25.8 74.7,26.79 v74.7,27.3
  Bottom 0.305: v33.02,33.66 33.98,34.62 60.32,34.62 64.39,30.56 72.31,30.56 74.7,28.17 v74.7,27.3
M_RF_IN2  (via drill 0.35)
  Top 0.305: U1.87 32.88,34.71 32.13,33.96 v32.13,32.79
  Top 0.406: IC2.25 74.39,24.5 v74.8,24.92
  Bottom 0.305: v74.8,24.92 73.97,25.76 73.97,27.77 71.69,30.05 64.17,30.05 60.11,34.11 34.74,34.11 33.43,32.79 v32.13,32.79
M_SLEEP  (via drill 0.35)  (1 unrouted)
  Top 0.305: U1.90 31.39,35.42 29.52,33.55 v29.52,29.36
  Top 0.406: IC2.17 72.81,19.28 74.49,19.28 75.39,18.39 v75.39,16.92 | IC1.17 55.66,19.28 57.07,19.28 v57.43,18.92
  Bottom 0.305: v57.43,18.92 56.34,18.92 55.07,20.19 55.07,27.25 54.25,28.07 30.79,28.07 29.52,29.34 v29.52,29.36
N$1
  Top 0.406: IC2.2 65.84,25.8 65.44,26.2 C21.2
N$2
  Top 0.406: IC2.1 67.89,26.45 68.06,26.63 68.06,27.53 C21.1
N$3
  Top 0.406: IC2.3 65.62,25.15 C22.1
N$4
  Top 0.406: IC2.10 65.43,20.6 65.43,15.13 P2.1
N$6
  Top 0.813: R3.2 78.07,6.8 FRONTLIGHT.P1
N$7
  Top 0.61: R5.1 16.36,6.79 LED1.2
N$8
  Top 0.254: U3.10 76.39,34.98 C7.1
N$9
  Top 0.61: M3.3 74.87,8.95 76.2,7.62 76.2,5.18 76.59,4.79 FRONTLIGHT.P2
N$10
  Top 0.508: R6.2 72.91,4.24 73.39,4.24 74.07,3.57
  Top 0.61: 74.07,3.57 R11.2
  Top 0.813: R6.2 72.2,5.23 M3.1
N$11
  Top 0.406: IC2.5 64.65,23.85 64.49,23.85 62.87,22.23 62.87,18.57 61.44,17.14 61.04,17.14 P4.6
N$12
  Top 0.406: IC2.7 64.89,22.55 63.68,21.34 63.68,16.69 59.69,12.7 59.69,5.79 P4.1
N$13
  Top 0.254: ABM8G-25.000MHZ-18-D2Y-T3.1 18.59,28.01 18.59,28.35 19.47,28.35 C11.2 19.91,28.93 20.19,29.21 U1.13
N$14
  Top 0.406: IC1.5 47.98,23.85 46.35,22.23 46.35,18.14 42.11,13.89 P3.6
N$16
  Top 0.305: U1.94 29.39,39.1 R7.1
N$18
  Top 0.406: IC1.2 48.49,25.8 48.26,26.04 C2.2
N$19
  Top 0.406: P2.6 63.6,6.96 63.6,15.75 64.29,16.44 64.29,20.78 65.41,21.9 IC2.8
N$20
  Top 0.406: IC1.1 50.74,26.45 50.93,26.64 50.93,27.48 C2.1
N$21
  Top 0.406: IC1.3 48.28,25.15 C3.1
N$22
  Top 0.508: PCA9533.1 9.36,39.55 R26.1
N$23
  Top 0.508: R27.1 10.16,38.29 PCA9533.2
N$24
  Top 0.508: PCA9533.3 10.53,37.02 10.03,36.52 10.03,36.11 R28.1
N$26
  Top 0.406: C25.1 71.45,17.48 71.97,18 IC2.15
N$27
  Top 0.406: IC1.7 47.65,22.55 47.22,22.12 47.22,17.37 42.55,12.7 42.55,5.71 40.72,3.89 P3.1
N$28
  Top 0.406: IC1.8 48.34,21.9 47.83,21.39 47.83,17.12 46.35,15.65 46.35,6.99 49.45,3.89 P1.6
N$29
  Top 0.406: IC1.15 54.68,18 54.23,17.55 C4.1
N$30
  Top 0.406: IC1.10 48.9,20.6 48.88,20.58 48.86,20.58 48.44,20.16 48.44,14.98 P1.1
N$31
  Top 0.508: RGB_LED.P4 7.33,39.22 R26.2
N$32  (via drill 0.35)
  Route2 0.61: P4.2 60.71,8.81 v60.71,8.89 61.98,10.16 64.94,10.16 P2.2
  Bottom 0.508: SJ1.2 v60.71,8.89
N$33
  Top 0.508: R27.2 3.25,37.19 RGB_LED.P3
N$35
  Top 0.508: RGB_LED.P2 7.27,35.22 R28.2
N$36
  Top 0.305: U1.49 37.88,20.23 C29.2
N$37
  Top 0.406: M2.1 10.58,43.13 R13.2 11.8,41.91 14.11,41.91 R22.2
N$38
  Top 0.508: M1.1 68.9,42.65 R9.2 R38.2
N$39
  Top 0.813: LIDAR_MOTOR.P1 74,45.52 D1.A 72.7,46.82 M1.3
N$41  (via drill 0.35)
  Route2 0.61: P3.2 40.64,5.94 43.56,8.86 v43.56,8.89 46.53,8.89 P1.2
  Bottom 0.508: SJ3.2 v43.56,8.89
N$44
  Top 0.254: ABM8G-25.000MHZ-18-D2Y-T3.3 17.32,30.14 C12.2 20.34,29.71 U1.12
N$45
  Top 0.305: U1.73 41.35,34.21 C32.2
N$55
  Top 0.813: FAN.P2 6.5,46.01 D3.A M2.3
NFAULT  (via drill 0.35)
  Top 0.305: R20.1 36.38,39.06 U1.80 36.38,34.02 38.73,31.67 38.73,27.94 v37.85,27.05
  Top 0.406: IC2.18 74.96,19.95 v75.97,18.94 | v57.58,17.88 58.22,18.52 58.22,19.51 57.77,19.95 IC1.18
  Route2 0.406: v57.58,17.88 59.16,16.31 73.33,16.31 v75.97,18.94
  Bottom 0.305: v37.85,27.05 38.35,27.56 43.31,27.56 48.9,21.97 48.9,19.13 51.52,16.51 56.21,16.51 v57.58,17.88
NRST  (via drill 0.2 pad 0.55)
  Top 0.305: U1.14 26.89,28.71 v26.92,28.68
  Bottom 0.305: RPI_ZERO.26 34.31,44.86 30.05,44.86 29.18,43.99 29.18,43.16 26.92,40.89 v26.92,28.68 28.04,28.68 C28.1
PWM1  (via drill 0.35)
  Top 0.305: U1.47 36.88,23.07 37.11,23.29 37.11,24.18 35.76,25.53 v35.71,25.53
  Bottom 0.305: JP5.3 6.33,24.97 7.91,24.97 8.89,23.98 8.89,21.45 11.09,19.25 14.81,19.25 15.75,20.19 23.71,20.19 29.07,25.55 35.69,25.55 v35.71,25.53
PWM2  (via drill 0.35)
  Top 0.305: v35.69,26.59 37.62,24.66 37.62,23.01 37.38,22.78 U1.48
  Bottom 0.305: JP5.4 6.15,27.69 8.2,27.69 11.25,24.64 14.1,24.64 16.54,22.2 25,22.2 28.86,26.06 35.15,26.06 v35.69,26.59
PWM3  (via drill 0.35)
  Top 0.305: U1.35 30.89,20.32 v31.32,19.89
  Bottom 0.305: JP1.3 9.7,16.51 18.28,16.51 19.84,18.06 23.04,18.06 29.52,24.54 30.4,24.54 31.32,23.62 v31.32,19.89
PWM4  (via drill 0.35)
  Top 0.305: U1.36 31.39,23.36 v32.03,24
  Bottom 0.305: JP1.4 6.33,22.43 6.33,20.85 10.16,17.02 18.07,17.02 19.63,18.57 22.8,18.57 29.28,25.04 30.99,25.04 v32.03,24
PWM_FAN
  Top 0.305: U1.96 28.39,40.42 26.9,41.91 15.81,41.91 R22.1
PWM_LIDAR  (via drill 0.35)
  Top 0.305: U1.95 28.89,40.9 v29.39,41.4 | v65.99,40.34 R38.1
  Bottom 0.305: v29.39,41.4 64.92,41.4 v65.99,40.34
PWM_LIGHT  (via drill 0.35)
  Top 0.305: U1.40 v33.38,19.97 v33.38,19.96 | R6.1 72.06,2.11 v72.19,1.98
  Bottom 0.305: v72.19,1.98 57.07,1.98 53.98,5.08 53.98,11.18 50.02,15.14 45.15,15.14 40.32,19.96 v33.38,19.96
SWCLK
  Top 0.305: RPI_ZERO.20 41.91,44.83 40.18,44.83 39.42,44.07 39.42,43.16 38.38,42.12 U1.76
SWDIO  (via drill 0.2 pad 0.55)
  Top 0.305: v39.42,42.19 39.42,36.27 38.68,35.54 38.68,34.09 39.06,33.71 U1.72
  Bottom 0.305: RPI_ZERO.24 39.42,44.88 v39.42,42.19
TEMPERATURE  (via drill 0.2 pad 0.55, 0.35)
  Top 0.305: R25.1 34.39,16.62 34.39,21.5 U1.42 34.38,26.92 37.82,30.35 v37.82,31.27
  Top 0.406: U5.1 60.14,28.76 v59.49,29.41
  Bottom 0.305: v59.49,29.41 56.59,29.41 55.4,30.61 38.48,30.61 v37.82,31.27
UART2_RX
  Top 0.305: U1.26 26.39,20.59 26.19,20.4 25.58,20.4 25.27,20.09 25.27,17.91 UART2.3
UART2_TX
  Top 0.305: U1.25 23.9,23.21 23.65,22.96 23.65,16.99 UART2.2
UART3_RX
  Top 0.305: U1.56 43.19,25.71 47.42,29.95 56.61,29.95 57.53,30.87 57.53,31.96 58.59,33.02 62.66,33.02 65.27,30.42 65.34,30.42 74.99,30.42 78.06,27.35 LDIAR.P1
UART3_TX
  Top 0.305: U1.55 43.45,25.21 47.65,29.41 56.79,29.41 58.04,30.66 58.04,31.75 58.78,32.49 62.53,32.49 65.12,29.9 74.37,29.9 76.39,27.87 76.39,22.67 77.38,21.69 LDIAR.P2
UART4_RX
  Top 0.305: U1.79 36.88,38.21 37.26,38.58 37.26,40.79 36.3,41.76 30.3,41.76 29.26,42.8 29.26,44.07 28.47,44.86 26.75,44.86 RPI_ZERO.34
UART4_TX
  Top 0.305: RPI_ZERO.32 29.21,44.93 33.66,44.93 34.31,44.27 34.31,43.05 35.1,42.27 36.56,42.27 37.77,41.05 37.77,38.35 37.38,37.97 U1.78
V+
  Top 0.305: PWR.1 9.24,20.63 9.24,24.02 10.79,25.57 R34.2
  Top 0.406: INA219.1 11.09,11.7 10.54,11.15 10.54,4.34 11.97,2.92 R17.2 8.71,2.92 | 8.71,2.92 4.88,2.92 C27.+ 2.54,5.26 2.54,13.93 PWR.1 | C16.1 8.71,2.92
  pour Route15: -17.14,33.66 -17.14,29.84 -13.34,29.84 -13.34,33.66
(copper drawn outside any net)
  shapes: Top area x2

## Text on the board
tNames: + | - + | 5v I1 I2 GND
bNames: ζ2 Motherboard | 5v GND SDA SCL